# Altium PCB PCB_Completo.PcbDoc
Units mm, origin at the board's own origin, x right, y up, seen from the top; angles counter-clockwise.
Board outline 257.56 x 147.12 mm, 2 copper layers (Top Layer, Bottom Layer); 126 components, 96 nets, 482 pads, 51 vias.
Unrouted connection lines stored in the file: 42.
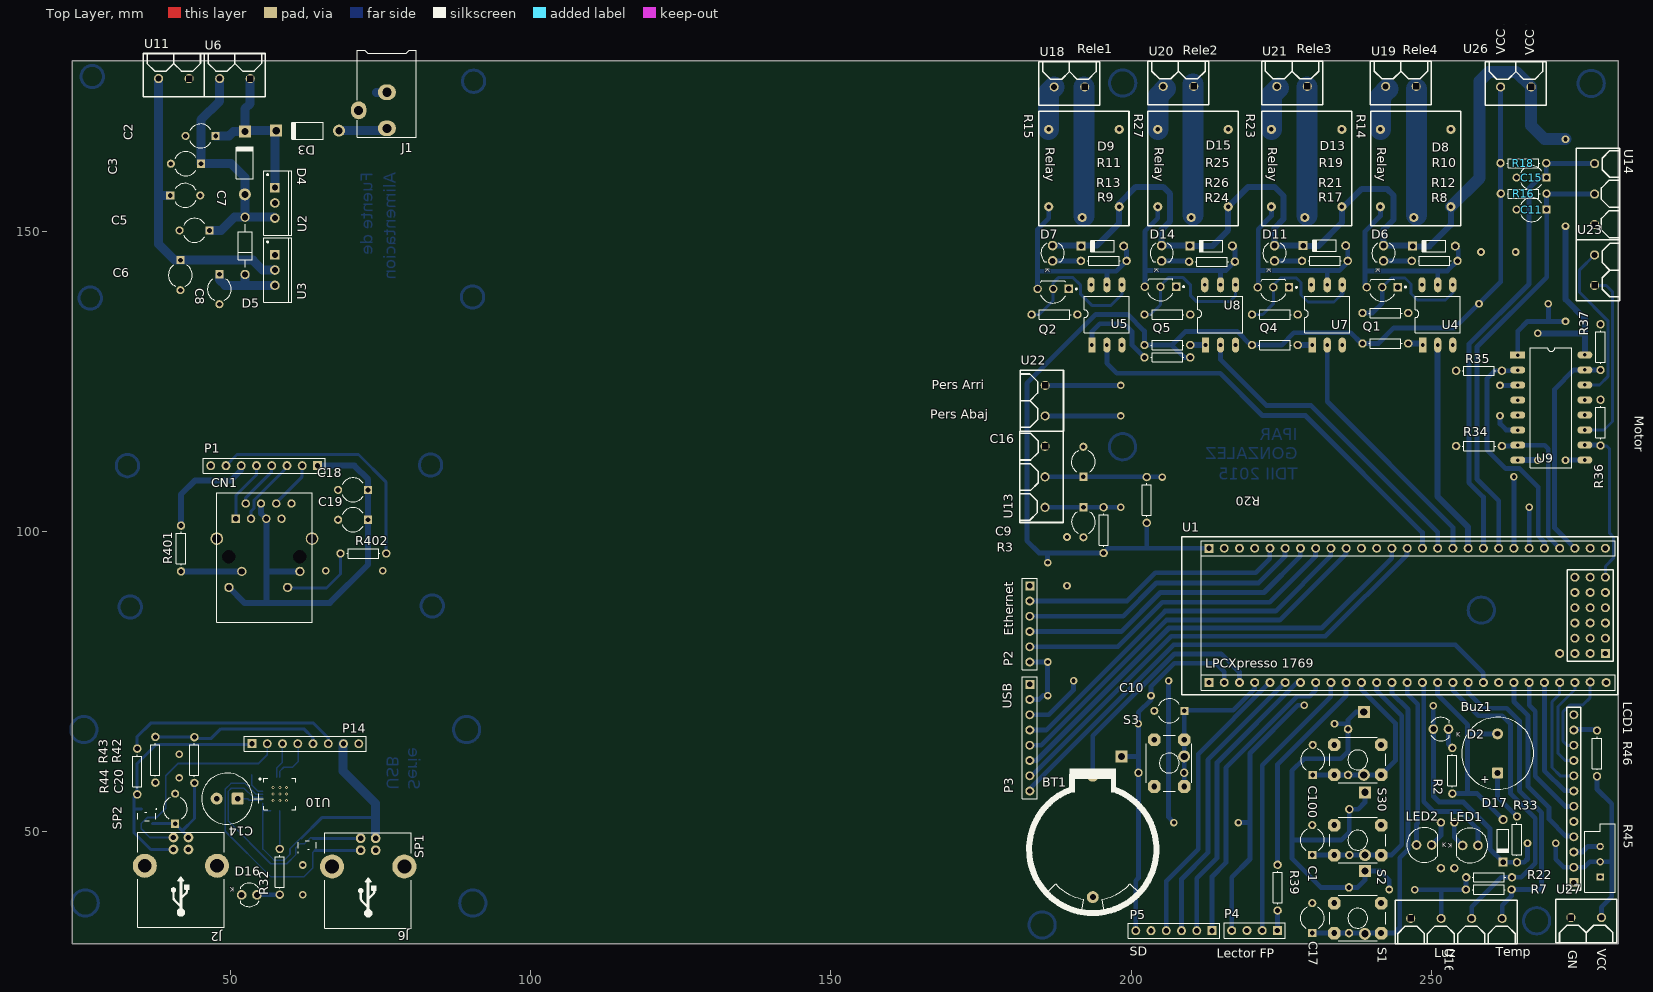
[diagram p0: Top Layer view]
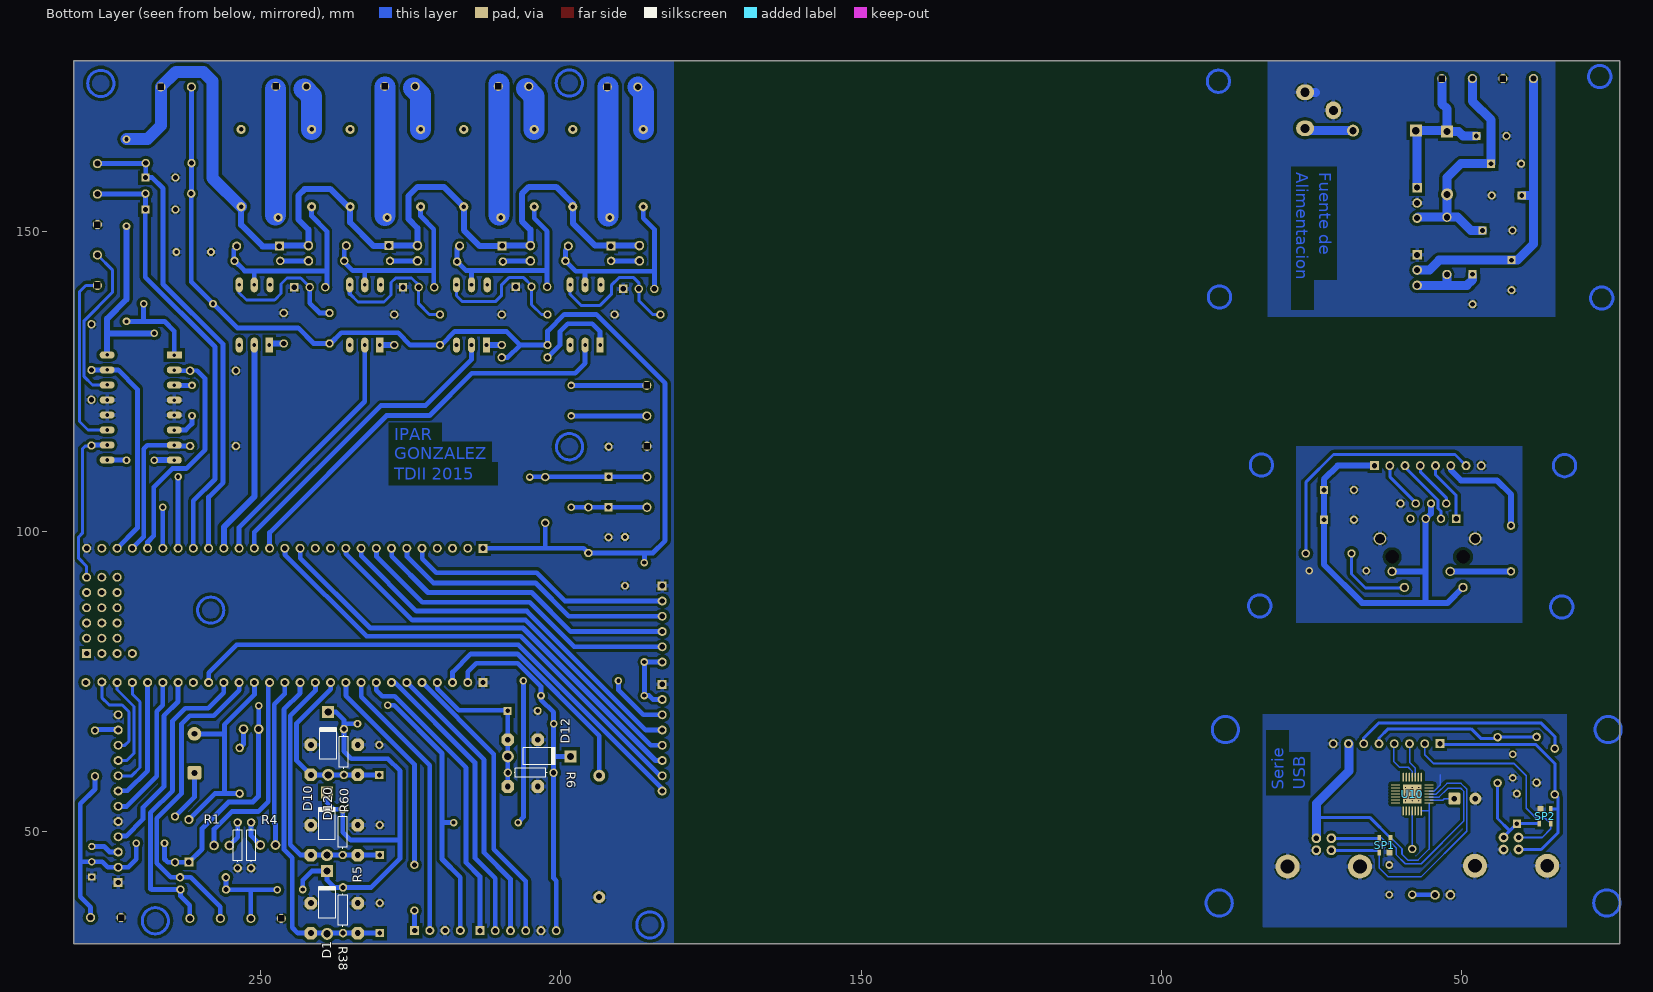
[diagram p1: Bottom Layer view, seen from below]

## Layer stack, top to bottom
Top Solder: solder mask 0.0102, Solder Resist, Dk 3.5
Top Layer: signal copper 0.0356
Dielectric 1: dielectric 0.32, FR-4, Dk 4.8
Bottom Layer: signal copper 0.0356
Bottom Solder: solder mask 0.0102, Solder Resist, Dk 3.5

## Board outline
23.622,31.318 281.178,31.318 281.178,178.435 23.622,178.435

## Design rules (kind name [scope] priority, off if disabled: settings)
Clearance [InNet('GND')] p1: gap=0.5
HoleSize [All] p1: absolutevalues=TRUE maxlimit=2.54 minlimit=0.1 maxpercent=80.000 minpercent=20.000
PlaneClearance [All] p1: clearance=0.254
PlaneConnect [All] p1: planeconnectstyle=Relief reliefexpansion=0.508 reliefentries=4 reliefconductorwidth=0.5 reliefairgap=0.5
PolygonConnect [All] p1: connectstyle=Relief reliefconductorwidth=0.7 reliefentries=4 polygonreliefangle="90 Angle" airgapwidth=0.254
RoutingVias [All] p1: holewidth=0.711 width=1.27 viastyle="Through Hole" minholewidth=0.711 minwidth=1.27 maxholewidth=0.711 maxwidth=1.27
SolderMaskExpansion [All] p1: expansion=0.102
UnpouredPolygon [All] p1: allowunpoured=FALSE
Width [All] p1: maxlimit=3.5 minlimit=0.254 preferedwidth=0.5 minimp=50.000000 maximp=50.000000 favimp=50.000000
26 further rules are at their usual default settings.

## Classes and differential pairs
component class U_USB: C14 C20 D16 J2 J6 P14 R32 R42 R43 R44 SP1 SP2 U10
component class U_Sensores: P4 R7 R22 R39 U16
component class U_Reles: D6 D7 D8 D9 D11 D13 D14 D15 P6 P7 P8 P9 P10 Q1 Q2 Q4 Q5 R8 R9 R10 R11 R12 R13 R14 R15 R17 R19 R21 R23 R24 R25 R26 R27 U4 U5 U7 U8 U18 U19 U20 U21
component class U_Motor: R34 R35 R36 R37 U9 U22 U23
component class "Fuente de Alimentación": C2 C3 C5 C6 C7 C8 D3 D4 D5 J1 U2 U3 U6 U11
component class U_FinDeCarrera: C9 C11 C15 C16 R3 R16 R18 R20 U13 U14
component class U_Ethernet: C18 C19 CN1 P1 R401 R402
component class U_Buzzer: Buz1 C1 C10 C17 C100 D1 D2 D10 D12 D17 D120 LED1 LED2 R1 R2 R4 R5 R6 R33 R38 R60 S1 S2 S3 S30
component class LPC1769: BT1 P2 P3 P5 U1 U26 U27
component class LCD: LCD1 R45 R46

## Components (designator, comment, footprint, x,y, rotation, side; value= is the part's Value field where it differs from the comment)
BT1 "120591-1" TECO-120591-1-2_V 193.624,47.015 r90 top
Buz1 "Alternate part: 3100-932" BUZZER_12.0X8.5MM 261.061,63.016 r90 top
C1 "Cap2" CAPR5-4X5 230.186,48.572 r90 top
C2 "Cap2" CAPR5-4X5 45.009,165.862 r180 top
C3 "Cap2" CAPR5-4X5 42.545,161.239 r180 top
C5 "Cap2" CAPR5-4X5 43.993,150.139 r180 top
C6 "Cap2" CAPR5-4X5 48.133,140.335 r270 top
C7 "Cap2" CAPR5-4X5 42.443,155.956 r0 top
C8 "Cap2" CAPR5-4X5 41.631,142.672 r270 top
C9 "Cap2" CAPR5-4X5 192.075,101.513 r270 top
C10 "Cap2" CAPR5-4X5 206.375,70.104 r180 top
C11 "Cap2" CAPR5-4X5 266.725,153.594 r180 top
C14 "1uF x 16V" CAPE3.5mm 49.428,55.474 r180 top
C15 "Cap2" CAPR5-4X5 266.715,158.928 r180 top
C16 "Cap2" CAPR5-4X5 192.049,111.593 r90 top
C17 "Cap2" CAPR5-4X5 230.186,35.566 r90 top
C18 "Cap2" CAPR5-4X5 70.409,106.909 r180 top
C19 "Cap2" CAPR5-4X5 70.409,101.93 r180 top
C20 "Cap2" CAPR5-4X5 40.767,53.797 r90 top
C100 "Cap2" CAPR5-4X5 230.263,61.932 r90 top
CN1 "Ethernet" RJ45 47.694,84.82 r0 top
D1 "1N4007" DO-41 238.949,38.185 r90 bottom
D2 "LED1" "Type 3mm" 251.612,67.056 r0 top
D3 "1N4007" DO-41 62.824,166.744 r180 top
D4 "1N4007" DO-41 52.375,161.366 r90 top
D5 "1N5819" ONSC-AXIAL_LEAD-2-59-10_P 52.41,147.567 r90 top
D6 "LED1" "Type 3mm" 242.062,146.329 r270 top
D7 "LED1" "Type 3mm" 186.944,146.329 r270 top
D8 "1N4148" DO-35 250.469,147.523 r180 top
D9 "1N4148" DO-35 195.224,147.523 r180 top
D10 "1N4007" DO-41 238.975,51.302 r90 bottom
D11 "LED1" "Type 3mm" 223.901,146.329 r270 top
D12 "1N4007" DO-41 203.62,62.509 r180 bottom
D13 "1N4148" DO-35 232.207,147.599 r180 top
D14 "LED1" "Type 3mm" 205.105,146.329 r270 top
D15 "1N4148" DO-35 213.335,147.549 r180 top
D16 "Red-LED" "Type 3mm" 53.111,39.446 r180 top
D17 "1N4148" DO-35 261.976,48.438 r270 top
D120 "1N4007" DO-41 238.772,64.662 r90 bottom
J1 "CONN_PWR_JACK_2.1x5.5mm" CONN_PWR_JACK_2.1x5.5mm 76.032,180.841 r0 top
J2 "USB-B" USB_TypeB_Tyco 41.732,34.011 r90 top
J6 "USB-B" USB_TypeB_Tyco 72.923,33.884 r90 top
LCD1 "GDM1602K" LCD 273.761,41.504 r90 top
LED1 "Verde" "Type 5mm" 256.515,47.676 r180 top
LED2 "Rojo" "Type 5mm" 248.818,47.752 r0 top
P1 "Header 8" HDR1X8 64.469,110.945 r180 top
P2 "Header 6" HDR1X6 183.134,90.932 r270 top
P3 "Header 8" HDR1X8 183.134,74.524 r270 top
P4 "Huella Digital" HDR1X4 224.384,33.503 r180 top
P5 "Header 6" HDR1X6 213.487,33.477 r180 top
P14 "Header 8" HDR1X8 53.569,64.618 r0 top
Q1 "2N5551RL1G" ONSC-TO-92-3-29-11_AM_BL 241.859,140.691 r180 top
Q2 "2N5551RL1G" ONSC-TO-92-3-29-11_AM_BL 187.029,140.382 r180 top
Q4 "2N5551RL1G" ONSC-TO-92-3-29-11_AM_BL 223.704,140.657 r180 top
Q5 "2N5551RL1G" ONSC-TO-92-3-29-11_AM_BL 204.904,140.757 r180 top
R1 "Res1" AXIAL-0.3 253.848,47.701 r90 bottom
R2 "Res1" AXIAL-0.3 253.517,60.121 r90 top
R3 "Res1" AXIAL-0.3 195.428,100.203 r270 top
R4 "Res1" AXIAL-0.3 251.612,47.701 r90 bottom
R5 "Res1" AXIAL-0.3 236.359,49.893 r90 bottom
R6 "Res1" AXIAL-0.3 205.04,59.792 r180 bottom
R7 "Res1" AXIAL-0.3 259.588,40.335 r180 top
R8 "Res1" AXIAL-0.3 242.367,131.293 r180 top
R9 "Res1" AXIAL-0.3 206.045,128.981 r0 top
R10 "Res1" AXIAL-0.3 250.571,145.059 r180 top
R11 "Res1" AXIAL-0.3 195.453,145.059 r180 top
R12 "Res1" AXIAL-0.3 242.367,136.373 r180 top
R13 "Res1" AXIAL-0.3 187.249,136.119 r180 top
R14 "Relay-12VDC" Rele 239.903,169.951 r270 top
R15 "Relay-12VDC" Rele 184.658,169.951 r270 top
R16 "Res1" AXIAL-0.3 265.405,156.261 r180 top
R17 "Res1" AXIAL-0.3 223.952,131.039 r180 top
R18 "Res1" AXIAL-0.3 265.354,161.341 r180 top
R19 "Res1" AXIAL-0.3 232.283,145.059 r180 top
R20 "Res1" AXIAL-0.3 202.616,105.232 r270 top
R21 "Res1" AXIAL-0.3 223.952,136.119 r180 top
R22 "Res1" AXIAL-0.3 259.639,42.367 r180 top
R23 "Relay-12VDC" Rele 221.742,169.951 r270 top
R24 "Res1" AXIAL-0.3 206.045,131.039 r180 top
R25 "Res1" AXIAL-0.3 213.487,144.932 r180 top
R26 "Res1" AXIAL-0.3 206.045,136.119 r180 top
R27 "Relay-12VDC" Rele 202.819,169.951 r270 top
R32 "Res1" AXIAL-0.3 58.191,43.282 r90 top
R33 "Res1" AXIAL-0.3 264.287,48.692 r270 top
R34 "Res1" AXIAL-0.3 257.962,114.21 r0 top
R35 "Res1" AXIAL-0.3 257.962,126.746 r180 top
R36 "Res1" AXIAL-0.3 278.206,118.11 r270 top
R37 "Res1" AXIAL-0.3 278.206,130.683 r90 top
R38 "Res1" AXIAL-0.3 236.308,36.881 r90 bottom
R39 "Res1" AXIAL-0.3 224.409,40.64 r270 top
R42 "Res1" AXIAL-0.3 43.967,61.9 r90 top
R43 "Res1" AXIAL-0.3 37.465,61.951 r90 top
R44 "Res1" AXIAL-0.3 34.442,59.995 r270 top
R45 "RPot" VR5 278.155,44.958 r90 top
R46 "Res1" AXIAL-0.3 277.622,63.017 r270 top
R60 "Res1" AXIAL-0.3 236.155,63.242 r90 bottom
R401 "Res1" AXIAL-0.3 41.744,97.145 r270 top
R402 "Res1" AXIAL-0.3 72.111,96.317 r180 top
S1 "SW_THT_PB_5.0mm" TACT-SWITCH-TC-37XB 237.756,35.571 r180 top
S2 "SW_THT_PB_5.0mm" TACT-SWITCH-TC-37XB 237.756,48.572 r180 top
S3 "SW_THT_PB_5.0mm" TACT-SWITCH-TC-37XB 206.35,61.392 r270 top
S30 "SW_THT_PB_5.0mm" TACT-SWITCH-TC-37XB 237.756,61.932 r180 top
SP1 "SP0503BAHT" SOT190P237X120-4N 62.763,47.727 r90 top
SP2 "SP0503BAHT" SOT190P237X120-4N 36.068,52.527 r270 top
U1 "LPCXPRESSO1769" Stick 208.407,99.085 r0 top
U2 "LM78M05CT" T03B 57.363,154.704 r270 top
U3 "LM1117T-3.3" T03B 57.363,143.528 r270 top
U4 "4N25" DIP6 248.59,131.039 r90 top
U5 "4N25" DIP6 193.472,131.039 r90 top
U6 "Bornera_2P" Bornera 55.804,179.603 r0 top
U7 "4N25" DIP6 230.175,131.039 r90 top
U8 "4N25" DIP6 212.395,131.039 r90 top
U9 "L293D" DIP16 264.414,129.362 r0 top
U10 "CP2102" CP2102 58.191,56.236 r90 top
U11 "Bornera_2P" Bornera 45.618,179.603 r0 top
U13 "Bornera_3T" BORNERA_3 181.483,101.473 r90 top
U14 "Bornera_3T" BORNERA_3 281.407,163.805 r270 top
U16 "Bornera_4T" BORNERA_4 244.043,31.318 r180 top
U18 "Bornera_2P" Bornera 194.818,178.232 r0 top
U19 "Bornera_2P" Bornera 250.038,178.308 r0 top
U20 "Bornera_2P" Bornera 212.979,178.308 r0 top
U21 "Bornera_2P" Bornera 231.902,178.308 r0 top
U22 "Bornera_2P" Bornera 181.508,126.848 r90 top
U23 "Bornera_2P" Bornera 281.407,138.43 r270 top
U26 "Bornera_2P" Bornera 269.189,178.232 r0 top
U27 "Bornera_2P" Bornera 270.739,31.471 r180 top

## Footprints (in the part's own frame and the unit in brackets; to place one, negate y for a bottom-side part, rotate by r counter-clockwise, add the part's x,y. Pads: shape width x height; smd on the part's side, far side on the other; paste and mask are expansions set on the pad)
AXIAL-0.3 [mm] "Axial Device, Thru-Hole; 2 Leads; 0.3 in Pin Spacing"
  round 1.4 hole 0.85: 1(-3.81,0) 2(3.81,0)
  silkscreen extent -2.77,-0.76 2.77,0.76
Bornera [mil] "Bornera Pitch 5_mm"
  round 60 hole 39.37 square: 1(-100,-165)
  round 60 hole 39.37: 2(-300,-165)
  silkscreen extent -400,-285 0,0
BORNERA_3 [mil] "Bornera de 3 Terminales Pitch 5 mm"
  round 60 hole 39.37 square: 1(500,-165)
  round 60 hole 39.37: 2(300,-165) 3(100,-165)
  silkscreen extent 0,-285 600,0
BORNERA_4 [mil] "Bornera de 4 Terminales Pitch 5 mm"
  round 60 hole 39.37 square: 1(-100,-165)
  round 60 hole 39.37: 2(-300,-165) 3(-500,-165) 4(-700,-165)
  silkscreen extent -800,-285 0,0
BUZZER_12.0X8.5MM [mil]
  round 20 on Mech15: 0(0,0)
  rrect25% 72x72 / inner rrect25% 72x72 / far side rrect25% 90x90 hole 38: 1(-127.95,0)
  round 72 / inner round 72 / far side round 90 hole 38: 2(127.95,0)
  silkscreen extent -236,-236 236,236, body extent -246,-246 246,246, height 354
CAPE3.5mm [mm]
  round 0.508 on Mech15: 0(0,0)
  rrect25% 2x2 hole 0.9: 1(-1.75,0)
  round 2 hole 0.9: 2(1.75,0)
  silkscreen extent -6.05,-4.25 4.25,4.25, body extent -4.25,-4.25 4.22,4.23, height 7.1
CAPR5-4X5 [mm] "Capacitor; 2 Leads"
  rect 1.35x1.35 hole 0.8: 1(-2.5,0)
  round 1.35 hole 0.8: 2(2.5,0)
  silkscreen extent -1.69,-2 1.82,2
CONN_PWR_JACK_2.1x5.5mm [mm] "Power Connector, 2.1mm ID, 5.5mm OD"
  oval 3x2.6 hole 1.511: 1(0,-13.7) 2(0,-7.7)
  oval 2.6x3 hole 1.511: 3(-4.7,-10.7)
  silkscreen extent -4.9,-15.22 4.92,-0.7, body extent -4.9,-14.1 4.5,0, height 11
CP2102 [mm]
  oval 0.2x1.5 smd far side: 1(1.5,2.806) 2(1,2.806) 3(0.5,2.806) 4(0,2.806) 5(-0.5,2.806) 6(-1,2.806) 7(-1.5,2.806) 15(-1.5,-2.806) 16(-1,-2.806) 17(-0.5,-2.806) 18(0,-2.806) 19(0.5,-2.806) 20(1,-2.806) 21(1.5,-2.806)
  oval 1.5x0.2 smd far side: 8(-2.806,1.5) 9(-2.806,1) 10(-2.806,0.5) 11(-2.806,0) 12(-2.806,-0.5) 13(-2.806,-1) 14(-2.806,-1.5) 22(2.806,-1.5) 23(2.806,-1) 24(2.806,-0.5) 25(2.806,0) 26(2.806,0.5) 27(2.806,1) 28(2.806,1.5)
  rect 3.13x3.13 smd far side: 29(0,0)
  silkscreen extent -2.65,-2.65 2.65,3.42, body extent -2.5,-2.5 2.5,2.5, height 1
DIP6 [mm]
  rect 2.5x1.2 hole 0.6: 1(0,0)
  oval 2.5x1.2 hole 0.6: 2(0,-2.5) 3(0,-5) 4(10.033,-5) 5(10.033,-2.5) 6(10.033,0.127)
  silkscreen extent 2.08,-6.25 8.13,1.25
DIP16 [mm]
  rect 2.5x1.2 hole 0.6: 1(0,0)
  oval 2.5x1.2 hole 0.6: 2(0,-2.5) 3(0,-5) 4(0,-7.5) 5(0,-10) 6(0,-12.5) 7(0,-15) 8(0,-17.5) 9(11.18,-17.474) 10(11.18,-14.974) 11(11.18,-12.474) 12(11.18,-9.974) 13(11.18,-7.474) 14(11.18,-4.974) 15(11.18,-2.474) 16(11.18,0.026)
  silkscreen extent 2.08,-18.75 9.02,1.25
DO-35 [mm] "Diode, Axial; Body 3.8 x 1.9 mm (LxDia. max), Lead Dia. 0.53 mm (max)"
  round 1.5 hole 0.9: 1(-3.55,0)
  rect 1.5x1.5 hole 0.9: 2(3.55,0)
  silkscreen extent -1.95,-0.95 2.05,0.95
DO-41 [mm] "Diode, Axial; Body 5.2 x 2.7 mm (LxDia. max), Lead Dia. 0.86 mm (max)"
  round 2 hole 1.2: 1(-5.23,0)
  rect 2x2 hole 1.2: 2(5.23,0)
  silkscreen extent -2.65,-1.4 2.75,1.4
HDR1X4 [mm] "Connector; Header; 4 Position"
  rect 1.5x1.5 hole 0.9: 1(0,0)
  round 1.5 hole 0.9: 2(2.54,0) 3(5.08,0) 4(7.62,0)
  silkscreen extent -1.27,-1.27 8.89,1.27
HDR1X6 [mm] "Connector; Header; 6 Position"
  rect 1.5x1.5 hole 0.9: 1(0,0)
  round 1.5 hole 0.9: 2(2.54,0) 3(5.08,0) 4(7.62,0) 5(10.16,0) 6(12.7,0)
  silkscreen extent -1.27,-1.27 13.97,1.27
HDR1X8 [mm] "Connector; Header; 8 Position"
  rect 1.5x1.5 hole 0.9: 1(0,0)
  round 1.5 hole 0.9: 2(2.54,0) 3(5.08,0) 4(7.62,0) 5(10.16,0) 6(12.7,0) 7(15.24,0) 8(17.78,0)
  silkscreen extent -1.27,-1.27 19.05,1.27
LCD [mm] "LCD Display de 16x2 Caracter"
  rect 1.5x1.5 hole 0.9: 1(0,0)
  round 1.5 hole 0.9: 2(2.54,0) 3(5.08,0) 4(7.62,0) 5(10.16,0) 6(12.7,0) 7(15.24,0) 8(17.78,0) 9(20.32,0) 10(22.86,0) 11(25.4,0) 12(27.94,0)
  silkscreen extent -1.27,-1.14 29.21,1.14
ONSC-AXIAL_LEAD-2-59-10_P [mm] "AXIAL, 2-Leads, Diameter 2.35mm"
  round 1.55 hole 1.05: 1(-4.77,0) 2(4.77,0)
  silkscreen extent -3.59,-1.17 3.59,1.17
ONSC-TO-92-3-29-11_AM_BL [mm] "TO, 3-Leads, Body Dia 4.7mm, Pitch 2.6mm"
  rect 1.4x1.4 hole 0.9: 1(-2.6,0)
  round 1.4 hole 0.9: 2(0,0) 3(2.6,0)
  silkscreen extent -3.98,-1.34 2.13,2.35, body extent -2.84,-1.34 2.84,2.36, height 5.33
Rele [mil] "Rele - 5pin"
  round 60 hole 30: 1(118.11,64.17) 2(695.67,283.46) 3(118.11,526.38) 4(625,526.38) 5(625,64.17)
  silkscreen extent 0,0 750,591
RJ45 [mm] "RJ45 - Ethernet"
  rect 1.4x1.4 hole 0.89: 1(3.175,17.272)
  round 1.4 hole 0.89: 2(4.826,19.812) 3(5.715,17.272) 4(7.366,19.812) 5(8.255,17.272) 6(9.906,19.812) 7(10.795,17.272) 8(12.446,19.812)
  round 1.55 hole 1.02: 9(2.032,5.842) 10(4.165,8.513) 11(11.811,5.842) 12(13.843,8.509)
  round 2.1 hole 1.6: MH1(0.002,13.972) MH2(15.873,13.972)
  round 2 hole 2.25 unplated: ""(2.032,10.922) ""(13.843,10.922)
  silkscreen extent -0.03,0.02 15.88,21.61, body extent -0.68,5.46 12.78,20.14
SOT190P237X120-4N [mm] "SOT143, 4-Leads, Body 2,92x2,37mm, Pitch 1,90mm, IPC Medium Density"
  rect 1x1 smd far side: 1(-1.2,0.75)
  rect 1x0.6 smd far side: 2(-1.2,-0.95) 3(1.2,-0.95) 4(1.2,0.95)
  silkscreen extent -1.25,-1.5 0.7,1.6, body extent -0.7,-1.52 0.7,1.52, height 1.2
Stick [mm] "Connector; Header Stick"
  rect 1.5x1.5 hole 0.9: 1(4.572,-24.257) 28(4.572,-1.905) 68(70.612,-19.431)
  round 1.5 hole 0.9: 2(7.112,-24.257) 3(9.652,-24.257) 4(12.192,-24.257) 5(14.732,-24.257) 6(17.272,-24.257) 7(19.812,-24.257) 8(22.352,-24.257) 9(24.892,-24.257) 10(27.432,-24.257) 11(29.972,-24.257) 12(32.512,-24.257) 13(35.052,-24.257) 14(37.592,-24.257) 15(40.132,-24.257) 16(42.672,-24.257) 17(45.212,-24.257) 18(47.752,-24.257) 19(50.292,-24.257) 20(52.832,-24.257) 21(55.372,-24.257) 22(57.912,-24.257) 23(60.452,-24.257) 24(62.992,-24.257) 25(65.532,-24.257) 26(68.072,-24.183) 27(70.739,-24.257) 29(7.112,-1.905) 30(9.652,-1.905) 31(12.192,-1.905) 32(14.732,-1.905) 33(17.272,-1.905) 34(19.812,-1.905) 35(22.352,-1.905) 36(24.892,-1.905) 37(27.432,-1.905) 38(29.972,-1.905) 39(32.512,-1.905) 40(35.052,-1.905) 41(37.592,-1.905) 42(40.132,-1.905) 43(42.672,-1.905) 44(45.212,-1.905) 45(47.752,-1.905) 46(50.292,-1.905) 47(52.832,-1.905) 48(55.372,-1.905) 49(57.912,-1.905) 50(60.452,-1.905) 51(62.992,-1.905) 52(65.532,-1.905) 53(68.072,-1.905) 54(70.612,-1.905) 55(62.992,-19.431) 56(65.532,-19.431) 57(65.532,-16.891) 58(65.532,-14.351) 59(65.532,-11.811) 60(65.532,-9.271) 61(65.532,-6.731) 62(68.072,-19.431) 63(68.072,-16.891) 64(68.072,-14.351) 65(68.072,-11.811) 66(68.072,-9.271) 67(68.072,-6.731) 69(70.612,-16.891) 70(70.612,-14.351) 71(70.612,-11.811) 72(70.612,-9.271) 73(70.612,-6.731)
  silkscreen extent 0,-26.29 72.64,0
T03B [mm] "TO, Thru-Hole, Vertical, Heatsink Mounted; 3 In-Line Leads; Pitch 2.54 mm"
  rect 1.6x1.6 hole 1: 1(-2.54,0)
  round 1.6 hole 1: 2(0,0) 3(2.54,0)
  silkscreen extent -5.35,-1.85 5.35,2.85, body extent -5.4,-1.9 5.4,2.9, height 19.8
TACT-SWITCH-TC-37XB [mm] "Wealth Metal sealed TH tact switch"
  round 0.508 on Mech15: 0(0,0)
  oct 2.1x2.1 hole 0.965: 1(-3.9,-2.5) 1(3.9,-2.5) 2(-3.9,2.5) 2(3.9,2.5)
  silkscreen extent -4.67,-3.79 4.67,3.79, body extent -4.46,-3.6 4.46,3.6, height 5
TECO-120591-1-2_V [mm] "Lithium Battery Holder"
  round 2 hole 1: 1(12.275,0) 2(-7.95,0)
  silkscreen extent -10.6,-10.6 13.47,10.6, body extent -10.62,-10.59 13.17,10.63, height 10
"Type 3mm" [mm] "THT, LED-3mm, 2pin- Body 4.15mm(max)"
  round 1.6 hole 1: 1(1.27,0) 2(-1.27,0)
  silkscreen extent -1.66,-1.95 1.4,1.95, body extent -1.93,-1.94 1.87,1.94, height 10.5
"Type 5mm" [mm] "THT, LED-5mm, 2pin- Body 5.8mm"
  round 1.6 hole 1: 1(1.27,0) 2(-1.27,0)
  silkscreen extent -2.9,-2.9 2.29,2.9, body extent -2.9,-2.9 2.5,2.9, height 11.7
USB_TypeB_Tyco [mm]
  round 1.626 hole 0.914: 1(14.99,-1.25) 2(14.99,1.25) 3(12.99,1.25) 4(12.99,-1.25)
  round 4 hole 2.3: MH(10.28,-6.02) MH(10.28,6.02)
  silkscreen extent 0,-7.2 15.9,7.2, body extent 0,-7.19 15.7,7.19, height 11.5
VR5 [mm] "Thru-Hole; 3 Leads"
  rect 1.2x1.2 hole 0.7: 1(-2.54,0)
  round 1.2 hole 0.7: 2(0,0) 3(2.54,0)
  silkscreen extent -5.08,-2.54 6.35,2.54

## Part data
BT1: library part CMP-0438-00001-1, "Lithium Battery Holder for CR2032 3V Cell"
Buz1: library part BZ_12x8.5x6.5_2kHz, "Speaker, Magnetic Transducer"
C1 C2 C3 C5 C6 C7 C8 C9 C10 C11 C15 C16 C17 C18 C19 C20 C100: "Capacitor"
C14: library part CAPE_220u_16V_THD, "Capacitor THT Alum Elec 220uF 20% 16V"
CN1: "RJ45 8pin Socket"
D1 D3 D4 D10 D12 D120: library part "Diode 1N4007", "1 Amp General Purpose Rectifier"
D2 D6 D7 D11 D14 D16: library part CMP-1488-00002-1, "THT LED round mono-color color lens, WL-TMRW, Super Red"
D5: library part CMP-1055-00042-1, "Rectifier, 2-Pin Axial_Lead, Pb-Free, Bulk Bag"
D8 D9 D13 D15 D17: library part "Diode 1N4148", "High Conductance Fast Diode"
J1: "Power Connector, THT, 2.1mm ID, 5.5mm OD"
J2 J6: library part USB_TypeB, "Connector THT Type B USB connector"
LCD1: library part LCD, "LCD GDM1602K Rev2.2"
LED1: library part CMP-1489-00005-1, "THT LED round mono-color waterclear, WL-TMRW, Green"
LED2: library part CMP-1488-00008-1, "THT LED round mono-color color lens, WL-TMRW, Red"
P1 P3 P14: "Header, 8-Pin"
P2 P5: "Header, 6-Pin"
P4: library part "Header 4", "Header, 4-Pin"
Q1 Q2 Q4 Q5: library part CMP-1048-01479-1, "Amplifier Transistor, NPN Silicon, 3-Pin TO-92, Pb-Free, Tape and Reel"
R1 R2 R3 R4 R5 R6 R7 R8 R9 R10 R11 R12 R13 R16 R17 R18 R19 R20 R21 R22 R24 R25 R26 R32 R33 R34 R35 R36 R37 R38 R39 R42 R43 R44 R46 R60 R401 R402: "Resistor"
R14 R15 R23 R27 U10: library part Component_1
R45: "Potentiometer"
S1 S2 S3 S30: "Switch, tact, 5.0mm stem"
SP1 SP2: library part Component_1, "Diode Array 30pF 30kV"
U1: library part LPC1769_Stick
U2: library part CMP-0062-02484-2, "3-Terminal Positive Voltage Regulators, 3-pin TO-220"
U3: library part CMP-0062-02490-2, "800mA Low-Dropout Linear Regulator, 3-pin TO-220"
U4 U5 U7 U8: library part Opto-4N25, "Optoacoplador"
U9: "Texas Quadruple Half-H Drivers"
U13 U14: "Bornera de 3 Terminales Pitch 5mm"
U16: "Bornera de 4 Terminales Pitch 5mm"

## Via types
v1: diameter 1.27, hole 0.711, Top Layer to Bottom Layer, 42 vias
v2: diameter 0.5, hole 0.2, Top Layer to Bottom Layer, 9 vias

## Nets (pads, with @x,y where several pads share a name; then routed paths per layer and width w, separated by ;. In a path a pad name is that pad's centre, name@x,y a point inside that pad or via, vN(x,y) a via of type N, cw(c..) or ccw(c..) an arc to the next point about the centre after c; other vN are vias at no path point)
BOTON_LOG: C100.1 D120.1 R60.1 S30.2 U1.11 | length 30.1
  Bottom Layer w0.8: C100.1 233.856,59.432 R60.1 D120.1 241.656,59.432 244.043,61.82 244.043,68.021 238.354,73.711 U1.11@238.354,74.828
BOTóN_ENROLL: C17.1 D1.1 R38.1 S1.2 U1.13 | length 57.5
  Bottom Layer w0.8: C17.1@230.191,33.071 233.856,33.071 R38.1 241.656,33.071 243.815,33.071 244.754,34.011 244.754,45.618 246.151,47.015 246.151,70.358 243.459,73.05 U1.13
BOTóN_RESET: C10.1 D12.1 R6.1 S3.2 U1.4 | length 27
  Bottom Layer w0.8: S3.2@208.85,57.492 R6.1 D12.1 208.85,65.292 208.85,70.206 216.992,70.206 220.599,73.812 U1.4
BOTóN_SALIDA: C1.1 D10.1 R5.1 S2.2 U1.12 | length 44.4
  Bottom Layer w0.8: C1.1 233.856,46.072 D10.1 241.656,46.072 243.379,46.072 245.085,47.777 245.085,69.291 240.894,73.482 U1.12@240.894,74.828
DAT1: 
DAT2: 
ETH_RXN: CN1.6 P1.2 P2.2 U1.32 | length 52.7
  Bottom Layer w0.5: CN1.6 57.6,104.776 61.929,109.105 P1.2
  Bottom Layer w0.8: P2.2 199.314,88.392 204.038,93.116 220.777,93.116 223.114,95.453 U1.32@223.114,97.18
ETH_RXP: CN1.3 P1.3 P2.3 U1.33 | length 59.3
  Bottom Layer w0.5: CN1.3 53.409,103.36 53.86,103.811 53.86,105.138 59.389,110.667 P1.3
  Bottom Layer w0.8: P2.3 198.679,85.852 204.241,91.415 221.234,91.415 225.654,95.834 U1.33@225.654,97.18
ETH_TXN: CN1.1 P1.5 P2.4 U1.34 | length 61.9
  Bottom Layer w0.5: CN1.1 50.869,105.97 54.309,109.41 P1.5
  Bottom Layer w0.8: P2.4 198.349,83.312 204.851,89.814 222.148,89.814 228.194,95.86 U1.34@228.194,97.18
ETH_TXP: CN1.2 P1.4 P2.5 U1.35 | length 63.3
  Bottom Layer w0.5: CN1.2 52.52,105.596 56.849,109.925 P1.4
  Bottom Layer w0.8: P2.5 197.815,80.772 205.232,88.189 223.088,88.189 230.734,95.834 U1.35@230.734,97.18
FDC1: C9.1 R3.1 U1.49 U13.3 | length 19.5
  Bottom Layer w0.8: U13.3 C9.1 R3.1 v1(198.298,104.013) ; U1.49 v1(266.319,104.013)
FDC2: C16.1 R20.1 U1.48 U13.2 | length 31.5
  Top Layer w0.8: v1@263.728,109.042 v1(263.779,109.093)
  Bottom Layer w0.8: U13.2 C16.1 205.13,109.093 v1(205.181,109.042) ; U1.48 v1(263.779,109.093)
FDC3: C11.1 R16.1 U1.47 U14.2 | length 72.9
  Bottom Layer w0.8: U1.47@261.239,97.587 261.239,105.105 257.632,108.712 257.632,130.734 269.24,142.342 C11.1@269.24,153.518 ; C11.1@269.215,153.605 R16.1 ; R16.1@269.215,156.185 U14.2
FDC4: C15.1 R18.1 U1.46 U14.3 | length 79.2
  Bottom Layer w0.8: U1.46 258.699,105.715 256.286,108.128 256.286,131.191 266.294,141.199 266.294,157.15 268.072,158.928 C15.1 ; C15.1@269.164,158.979 R18.1@269.164,161.265 ; R18.1 R18.1@269.164,161.265 ; U14.3 R18.1@269.164,161.265
GND: BT1.2 C1.2 C2.2 C3.2 C5.2 C6.2 C7.2 C8.2 C9.2 C10.2 C11.2 C14.2 C15.2 C16.2 C17.2 C18.2 C19.2 C20.2 C100.2 CN1.8 CN1.MH1 CN1.MH2 D16.1 J1.2 J1.3 J2.4 J2.MH J6.4 J6.MH LCD1.1 LCD1.5 LCD1.12 P1.8 P2.1 P3.1 P4.3 P5.5 P14.8 Q1.1 Q2.1 Q4.1 Q5.1 R1.1 R4.1 R12.1 R13.1 R21.1 R26.1 R34.1 R35.2 R36.1 R37.2 R43.1 R45.1 S1.1 S2.1 S3.1 S30.1 SP1.1 SP2.1 U1.1 U1.54 U2.2 U3.1 U9.4 U9.5 U9.12 U9.13 U10.3 U10.14 U11.1 U13.1 U14.1 U16.1 U27.1 | length 6.8
  Top Layer w0.254: J6.MH@66.642,44.425 J6.MH@66.903,44.164
  Bottom Layer w0.254: 53.559,59.442 53.559,57.693 54.516,56.736 U10.3
  Bottom Layer w1: R21.1@227.695,136.186 R21.1
  Bottom Layer w1.5: J1.3@70.856,169.665 J1.3 ; 74.332,173.141 J1.2
  other v1: 62.027,39.472 62.027,44.425 41.427,58.928 41.427,62.865 189.332,90.932 65.862,93.447 75.362,93.447 189.332,99.06 258.293,146.533 264.058,146.533
LCD_DB4: LCD1.7 U1.23 | length 20.9
  Bottom Layer w0.8: U1.23 268.859,60.147 272.212,56.794 LCD1.7@273.685,56.794
LCD_DB5: LCD1.8 U1.24 | length 18.9
  Bottom Layer w0.5: U1.24 271.399,72.898 270.104,71.603 270.104,60.655 271.475,59.284 LCD1.8
LCD_DB6: LCD1.9 U1.25 | length 16.1
  Bottom Layer w0.5: LCD1.9 272.313,61.824 271.12,63.017 271.12,70.841 273.939,73.66 U1.25
LCD_DB7: LCD1.10 U1.26 | length 15.1
  Bottom Layer w0.5: LCD1.10 272.644,64.364 271.958,65.049 271.958,69.926 273.101,71.069 275.26,71.069 276.479,72.288 U1.26
LCD_ENABLE: LCD1.6 U1.22 | length 24.5
  Bottom Layer w0.8: U1.22 266.319,71.044 267.335,70.028 267.335,59.207 272.364,54.178 LCD1.6@273.685,54.178
LCD_RST: LCD1.4 U1.21 | length 30.4
  Bottom Layer w0.8: U1.21 263.779,71.653 266.141,69.291 266.141,57.48 269.634,53.988 269.634,52.032 272.44,49.225 LCD1.4@273.685,49.225
LED_GREEN: P1.6 R401.1 | length 17.7
  Bottom Layer w0.5: R401.1 R401.1@41.779,100.955
  Bottom Layer w1: R401.1 41.744,106.158 44.094,108.509 50.063,108.509 51.769,110.214 P1.6
LED_ROJO: LED2.2 U1.14 | length 27.9
  Bottom Layer w0.8: U1.14 245.999,72.923 247.752,71.171 247.752,51.384 247.536,51.168 ; LED2.2 247.548,51.181
LED_VERDE: LED1.2 U1.15 | length 33.6
  Bottom Layer w0.8: U1.15@248.514,74.828 248.768,74.574 248.768,54.991 250.431,53.327 254.851,53.327 257.785,50.394 LED1.2
LED_YELLOW: P1.7 R402.1 | length 41.2
  Bottom Layer w0.5: P1.7 51.079,112.795 71.304,112.795 75.921,108.179 R402.1
MISO: P5.3 U1.6 | length 48.5
  Bottom Layer w0.8: P5.3 208.407,42.088 212.801,46.482 212.801,61.951 U1.6
MOSI: P5.4 U1.5 | length 48.5
  Bottom Layer w0.8: P5.4 205.867,41.732 211.201,47.066 211.201,62.89 U1.5
NetBT1_1: BT1.1 U1.3 | length 39.7
  Bottom Layer w0.8: BT1.1 193.624,65.964 207.239,79.578 215.036,79.578 218.059,76.556 U1.3
NetBuz1_1: Buz1.1 R33.1 | length 8.6
  Bottom Layer w0.8: Buz1.1 261.061,55.728 R33.1
NetC6_1: C6.1 D5.1 U3.3 | length 12.1
  Bottom Layer w1.5: C6.1@48.133,142.741 48.133,141.935 49.08,140.988 U3.3 ; 52.41,141.125 D5.1
NetC14_1: C14.1 U10.6 | length 4.1
  Bottom Layer w0.254: C14.1 52.857,55.474 53.111,55.22 U10.6@55.198,55.22
NetC20_1: C20.1 J2.1 R42.1 SP2.4 | length 15.8
  Bottom Layer w0.5: SP2.4 37.048,51.297 C20.1 41.93,50.134 ; J2.1 42.982,49.082 41.93,50.134 ; R42.1 43.967,52.172 41.93,50.134
NetCN1_10: CN1.10 R401.2 | length 10.1
  Bottom Layer w0.5: R401.2 R401.2@41.746,93.333
  Bottom Layer w1: R401.2@41.746,93.333 CN1.10
NetCN1_11: CN1.11 R402.2 | length 13.1
  Bottom Layer w0.5: CN1.11@59.59,90.576 65.989,90.576 68.301,92.888 R402.2
NetD2_1: D2.1 R2.2 | length 3.7
  Bottom Layer w0.8: D2.1 252.882,64.566 R2.2 R2.2@253.517,64.286
NetD3_1: D3.1 J1.1 | length 8.1
  Bottom Layer w1.5: D3.1 75.635,166.744 J1.1
NetD6_1: D6.1 R10.2 | length 4.7
  Bottom Layer w0.8: D6.1 R10.2
NetD7_1: D7.1 R11.2 | length 4.7
  Bottom Layer w0.8: D7.1 R11.2
NetD8_1: D8.1 Q1.3 R10.1 R14.5 U4.5 | length 35.2
  Bottom Layer w0.5: D8.1@253.994,147.472 D8.1@254.508,146.958 ; R10.1 R10.1@254.508,145.186
  Bottom Layer w0.8: Q1.3@238.989,140.961 238.989,143.408 ; R14.5 241.533,152.531 238.989,149.987 238.989,143.408 ; U4.5 251.09,143.318 ; R10.1 252.705,143.383 239.014,143.383 238.989,143.408 ; R10.1@254.508,145.186 D8.1@254.508,146.958
NetD9_1: D9.1 Q2.3 R11.1 R15.5 U5.5 | length 34.2
  Bottom Layer w0.8: Q2.3 184.429,150.291 ; 184.598,150.46 186.288,152.15 R15.5 ; 184.617,143.332 197.536,143.332 R11.1 199.263,146.831 D9.1@198.749,147.345 ; U5.5 195.972,143.231
NetD11_1: D11.1 R19.2 | length 4.6
  Bottom Layer w0.8: D11.1 R19.2
NetD13_1: D13.1 Q4.3 R19.1 R23.5 U7.5 | length 34.8
  Bottom Layer w0.5: D13.1@235.579,147.345 236.093,146.831
  Bottom Layer w0.8: Q4.3@221.174,140.727 221.174,143.434 ; R23.5 223.372,152.531 221.174,150.333 221.174,143.434 ; U7.5 232.675,143.419 ; 236.093,146.831 R19.1 236.093,144.856 234.671,143.434 221.174,143.434
NetD14_1: D14.1 R25.2 | length 4.4
  Bottom Layer w0.8: D14.1 R25.2@209.55,145.059
NetD15_1: D15.1 Q5.3 R25.1 R27.5 U8.5 | length 34.8
  Bottom Layer w0.8: Q5.3 202.304,150.005 204.449,152.15 R27.5 ; 202.437,143.434 215.798,143.434 R25.1 217.297,147.136 D15.1 ; U8.5 214.895,143.419
NetD16_2: D16.2 R32.1 | length 3.8
  Bottom Layer w0.8: D16.2@54.407,39.472 R32.1
NetJ6_2: J6.2 SP1.3 U10.5 | length 39
  Bottom Layer w0.254: U10.5 53.713,55.736 52.248,57.201 50.089,57.201 49.632,56.744 49.632,51.689 56.693,44.628 59.36,44.628 60.886,46.154 60.886,47.286 61.581,47.981 62.332,47.981 63.278,48.927 SP1.3
  Bottom Layer w0.5: SP1.3@63.766,48.874 J6.2
NetJ6_3: J6.3 SP1.2 U10.4 | length 43.4
  Bottom Layer w0.254: U10.4 54.178,56.236 52.4,58.014 50.063,58.014 49.124,57.074 49.124,50.038 56.667,42.494 62.255,42.494 63.713,43.952 SP1.2 64.06,46.874
  Bottom Layer w0.5: 64.06,46.874 J6.3
NetLCD1_3: LCD1.3 R45.3 | length 4.8
  Bottom Layer w0.8: LCD1.3 275.184,46.584 276.098,47.498 R45.3
NetLCD1_11: LCD1.11 R46.1 | length 4.1
  Bottom Layer w0.8: LCD1.11@273.66,67.005 R46.1@277.724,67.005
NetLED1_1: LED1.1 R1.2 | length 4.4
  Bottom Layer w0.8: R1.2 253.848,49.073 LED1.1
NetLED2_1: LED2.1 R4.2 | length 4.4
  Bottom Layer w0.8: LED2.1 251.612,49.276 R4.2
NetP4_1: P4.1 R39.2 | length 3.3
  Bottom Layer w0.8: P4.1@224.409,33.528 R39.2
NetQ1_2: Q1.2 R12.2 U4.4 | length 23.3
  Bottom Layer w0.5: Q1.2 243.359,142.191 245.627,142.191 246.619,141.199 246.619,139.609 247.696,138.532 252.4,138.532 253.59,139.722 U4.4
  Bottom Layer w0.8: R12.2 240.208,136.373 241.859,138.024 Q1.2
NetQ2_2: Q2.2 R13.2 U5.4 | length 24.5
  Bottom Layer w0.5: R13.2 184.709,136.119 187.029,138.439 Q2.2 187.029,141.41 187.884,142.265 190.348,142.265 191.541,141.072 191.541,139.573 193.472,137.643 196.647,137.643 198.472,139.468 U5.4
NetQ4_2: Q4.2 R21.2 U7.4 | length 24.5
  Bottom Layer w0.5: R21.2 221.92,136.119 223.698,137.897 Q4.2@223.698,140.818 ; Q4.2@223.704,141.04 224.879,142.215 227.533,142.215 228.295,141.453 228.295,139.37 229.464,138.201 233.807,138.201 235.175,139.569
  Bottom Layer w0.8: Q4.2 Q4.2@223.704,141.04 ; 235.175,139.569 U7.4
NetQ5_2: Q5.2 R26.2 U8.4 | length 24.5
  Bottom Layer w0.5: R26.2 203.251,136.119 204.902,137.77 204.902,140.945 206.214,142.257 208.679,142.257 209.931,141.004 209.931,139.243 210.922,138.252 216.383,138.252 217.395,139.264 U8.4
NetR8_1: R8.1 U4.1 | length 2.2
  Bottom Layer w1: R8.1 U4.1@248.336,131.293
NetR9_1: R9.1 U5.1 | length 15.2
  Bottom Layer w0.8: U5.1 193.472,133.274 194.793,134.595 198.857,134.595 200.152,133.299 200.152,131.064 R9.1
NetR14_1: R14.1 U19.2 | length 7.3
  Bottom Layer w3.5: R14.1 241.533,172.47 U19.2@242.761,173.698
NetR14_2: R14.2 U19.1 | length 21
  Bottom Layer w3.5: R14.2@247.574,152.73 U19.1@247.574,173.685
NetR15_1: R15.1 U18.2 | length 7.5
  Bottom Layer w3.5: R15.1 186.288,173.131 U18.2
NetR15_2: R15.2 U18.1 | length 21.9
  Bottom Layer w1: R15.2 R15.2@192.126,152.549
  Bottom Layer w3.5: R15.2@192.126,152.549 U18.1@192.126,174.041
NetR17_1: R17.1 U7.1 | length 2.4
  Bottom Layer w1: R17.1 U7.1
NetR23_1: R23.1 U21.2 | length 7.4
  Bottom Layer w3.5: R23.1 223.372,172.661 U21.2@224.555,173.844
NetR23_2: R23.2 U21.1 | length 21.4
  Bottom Layer w3.5: R23.2@229.337,152.6 U21.1@229.337,174.015
NetR24_1: R24.1 U8.1 | length 2.5
  Bottom Layer w1: R24.1 U8.1
NetR27_1: R27.1 U20.2 | length 7.3
  Bottom Layer w3.5: R27.1 204.449,172.47 U20.2@205.727,173.749
NetR27_2: R27.2 U20.1 | length 21.8
  Bottom Layer w3.5: R27.2@210.312,152.662 U20.1@210.312,174.498
NetR32_2: R32.2 U10.11 | length 6.3
  Bottom Layer w0.254: R32.2 U10.11
NetU9_3: U9.3 U22.1 | length 15.5
  Bottom Layer w0.8: U22.1 v1(198.298,124.308) ; v1(261.468,124.308) U9.3@264.359,124.308
NetU9_6: U9.6 U22.2 | length 17.3
  Bottom Layer w0.8: U22.2 v1(198.298,119.228) ; v1(261.468,119.253) 261.468,117.907 262.484,116.891 U9.6@264.385,116.891
NetU9_11: U9.11 U23.1 | length 30.2
  Bottom Layer w0.5: U9.11 278.788,116.889 280.187,118.288 280.187,139.929 279.146,140.97 U23.1
NetU9_14: U9.14 U23.2 | length 27.6
  Bottom Layer w0.5: U9.14 278.033,124.389 279.41,125.766 279.41,135.092 274.726,139.776 274.726,143.561 U23.2
OBUZZER: Buz1.2 D17.1 R2.1 U1.16 | length 35.8
  Bottom Layer w0.8: U1.16@251.054,74.828 251.054,72.796 256.057,67.793 256.057,66.266 ; R2.1 256.057,56.311 ; Buz1.2 256.057,66.266 ; D17.1 257.653,56.311 256.057,56.311 ; 256.057,56.311 256.057,66.266
PERSI_DER: R34.2 U1.51 U9.7 | length 25.2
  Bottom Layer w0.8: R34.2 U9.7@264.262,114.21 ; U9.7@264.389,114.337 268.81,114.337 268.902,114.333 269.507,113.728 269.507,99.073 U1.51
PERSI_IZQ: R35.1 U1.50 U9.2 | length 39.2
  Bottom Layer w0.8: R35.1 U9.2@264.298,126.746 ; R35.1@261.772,126.848 261.764,126.847 260.579,126.746 259.283,125.451 259.283,113.589 262.416,110.456 264.753,110.456 267.843,107.366 267.843,99.238 268.859,98.222 U1.50
PUERTA_DER: R36.2 U1.73 U9.10 | length 26.6
  Bottom Layer w0.5: U9.10 U9.10@275.734,114.249 ; R36.2@278.257,114.249 279.197,114.249 279.73,113.716 279.73,99.67 280.34,99.06 280.34,95.504 279.019,94.183 U1.73
  Bottom Layer w0.8: U9.10 R36.2@278.118,114.389
PUERTA_IZQ: R37.1 U1.52 U9.15 | length 36.9
  Bottom Layer w0.8: U1.52 270.561,100.559 270.561,123.673 273.777,126.889 U9.15 R37.1@278.191,126.889
RELE1: U1.42 U5.2 | length 69.9
  Bottom Layer w0.8: U5.2 195.972,128.005 197.637,126.34 214.833,126.34 221.894,119.278 229.057,119.278 248.539,99.797 U1.42
RELE2: U1.43 U8.2 | length 53.2
  Bottom Layer w0.8: U8.2 214.895,128.64 222.58,120.955 229.997,120.955 251.079,99.873 U1.43
RELE3: U1.44 U7.2 | length 42.5
  Bottom Layer w0.8: U7.2 232.675,121.63 253.619,100.686 U1.44
RELE4: U1.45 U4.2 | length 36
  Bottom Layer w1: U4.2 251.09,105.78 256.159,100.711 U1.45
RX0: P3.6 P14.4 U1.40 U10.25 | length 83.6
  Bottom Layer w0.254: U10.25@58.201,59.042 58.21,59.042 58.21,60.065 58.852,60.706 60.325,60.706 61.239,61.62 P14.4@61.239,64.618
  Bottom Layer w0.8: P3.6 184.252,61.824 206.324,83.896 231.775,83.896 243.434,95.555 U1.40@243.434,97.18
RXD2: P3.7 P14.3 U1.41 U10.26 | length 85.1
  Bottom Layer w0.254: U10.26 57.691,60.562 58.572,61.443 P14.3@58.572,64.618
  Bottom Layer w0.8: P3.7 183.49,59.284 206.731,82.525 232.385,82.525 245.974,96.114 U1.41@245.974,97.18
RXD3: R39.1 U1.10 | length 35.1
  Bottom Layer w0.8: R39.1 224.409,61.214 235.814,72.619 U1.10@235.814,74.828
SCK: P5.2 U1.7 | length 48.8
  Bottom Layer w0.8: P5.2 210.947,42.215 214.325,45.593 214.325,61.493 227.66,74.828 U1.7
SENLUZ: R22.1 U1.17 U16.3 | length 53.7
  Bottom Layer w0.8: U1.17@253.594,74.828 253.594,73.533 257.861,69.266 261.849,69.266 263.22,67.894 263.22,56.286 267.329,52.178 267.329,44.723 264.973,42.367 R22.1 261.671,42.367 256.743,37.44 U16.3
SENSOR_TEMP: R7.1 U1.18 U16.4 | length 52
  Bottom Layer w0.8: U1.18 256.159,73.127 258.75,70.536 262.585,70.536 264.693,68.428 264.693,56.82 268.383,53.131 268.383,40.392 ; U16.4 261.823,37.694 263.398,39.268 R7.1 268.173,40.335
SSEL: P5.1 U1.8 | length 49.7
  Bottom Layer w0.8: P5.1 213.487,42.494 215.798,44.806 215.798,60.604 227.711,72.517 229.743,72.517 230.759,73.533 U1.8
TXD3: P4.2 U1.9 | length 46.1
  Bottom Layer w0.8: P4.2 221.844,61.011 233.274,72.441 U1.9@233.274,74.828
USB_D+: J2.3 P3.5 P14.1 R44.2 SP2.2 U1.37 | length 107.9
  Bottom Layer w0.5: 34.042,53.727 SP2.2 ; J2.3 36.718,47.001 33.884,49.835 33.884,55.626 R44.2 34.442,61.341 37.607,64.506 53.457,64.506 P14.1
  Bottom Layer w0.8: P3.5 185.014,64.364 205.867,85.217 224.765,85.217 235.814,96.266 U1.37@235.814,97.18
USB_D-: J2.2 P3.4 P14.2 SP2.3 U1.36 | length 101
  Bottom Layer w0.3: J2.2 36.547,49.001 35.118,50.429 SP2.3 36.115,52.324 37.643,52.324 39.192,53.873 39.192,59.258 41.275,61.341 54.686,61.341 56.109,62.763 P14.2
  Bottom Layer w0.8: P3.4 185.852,66.904 205.664,86.716 224.079,86.716 233.274,95.91 U1.36@233.274,97.18
VBUS: P3.8 P14.5 R42.2 R43.2 U1.19 | length 118.1
  Bottom Layer w0.5: R43.2@37.516,65.71 R42.2 44.129,65.872 44.469,65.532 46.787,65.532 48.362,67.107 62.205,67.107 63.729,65.583 P14.5
  Bottom Layer w0.8: P3.8 183.134,57.15 207.086,81.102 254.025,81.102 258.674,76.454 U1.19@258.674,74.828
VCC-3.3V: C7.1 C8.1 C18.1 C19.1 CN1.4 CN1.5 CN1.9 CN1.12 D1.2 D10.2 D12.2 D120.2 P1.1 P2.6 P3.2 P5.6 P14.6 R3.2 R5.2 R6.2 R7.2 R8.2 R9.2 R16.2 R17.2 R18.2 R20.2 R22.2 R24.2 R38.2 R44.1 R60.2 U1.2 U1.28 U3.2 U9.1 U9.9 U11.2 U16.2 U26.2 | length 538.2
  Top Layer w0.8: v1(243.002,40.335) v1@243.053,40.284
  Bottom Layer w0.5: R44.1 34.442,65.811 36.678,68.047 63.805,68.047 66.269,65.583 P14.6 ; R17.2@219.972,131.039 R17.2 ; R8.2@238.387,131.293 R8.2
  Bottom Layer w0.8: P3.2 184.658,71.984 185.318,72.644 v1(186.106,72.644) v1(186.106,78.232) P2.6 ; v1(186.106,94.793) 186.106,96.393 ; D12.2 201.204,62.509 ; P5.6 200.787,41.808 201.23,42.251 R6.2 201.23,69.861 203.327,71.958 v1(203.327,72.644) 203.327,74.176 207.18,78.029 214.097,78.029 215.519,76.606 U1.2 ; 202.616,97.612 R20.2@202.616,101.498 ; R9.2 208.864,128.981 206.807,131.039 ; U1.28 196.215,97.18 R3.2 186.106,96.393 ; R17.2@219.972,131.039 217.704,133.307 209.075,133.307 206.807,131.039 ; R17.2 225.095,131.039 227.127,133.071 236.609,133.071 R8.2@238.387,131.293 ; 226.898,48.565 235.026,48.565 236.359,49.897 R5.2 237.832,53.703 238.975,54.846 D10.2 ; v1(233.883,67.945) 236.155,67.945 ; R8.2 241.198,131.293 243.789,133.883 253.924,133.883 261.595,141.554 R16.2 ; D120.2 237.456,69.892 236.155,68.592 236.155,67.945 ; v1(243.002,40.335) 243.002,41.916 241.503,43.415 D1.2 238.949,41.895 237.745,40.691 R38.2 231.623,40.691 226.797,45.517 226.797,60.096 228.829,62.128 234.925,62.128 236.155,63.359 R60.2 236.155,67.945 ; v1(247.244,40.284) 255.727,40.284 R7.2 R22.2@255.778,42.316 ; U16.2 251.663,40.132 ; R16.2@261.544,156.312 R18.2 U26.2@261.544,174.041 ; U9.1 264.414,133.35 266.04,134.976 269.519,134.976 ; v1(269.519,137.922) 269.519,134.976 ; v1(272.364,111.862) U9.9@275.568,111.862 ; v1(272.364,134.976) 269.519,134.976 ; 186.106,96.393 184.683,96.393 182.651,98.425 182.651,124.663 194.132,136.144 199.441,136.144 202.235,133.35 R24.2 206.807,131.039
  Bottom Layer w1: CN1.9 52.3,88.087 66.523,88.087 72.909,94.473 C19.1 C18.1 72.909,108.65 70.614,110.945 P1.1 ; CN1.4 55.06,102.981 CN1.5 55.949,88.131 ; 55.983,93.329 CN1.12
  Bottom Layer w1.5: U11.2 37.998,155.956 ; C7.1 37.998,155.956 ; U3.2 55.354,143.528 53.71,145.172 C8.1 40.655,145.172 37.998,147.828 37.998,155.956
  other v1: 201.193,67.945 257.962,137.922
VCC_5V: C3.1 C5.1 D2.2 D4.1 D5.2 D17.2 J6.1 LCD1.2 P3.3 P4.4 P14.7 R33.2 R45.2 R46.2 SP1.4 U2.3 U6.2 U10.7 U10.8 U27.2 | length 249.9
  Bottom Layer w0.254: U10.7 55.385,53.416 ; U10.8 55.399,53.43 55.385,53.416 ; SP1.4@61.677,48.927 59.893,47.142 59.893,46.203 58.928,45.237 57.226,45.237 55.385,47.078 55.385,53.416
  Bottom Layer w0.5: SP1.4 65.185,52.299 74.173,52.299
  Bottom Layer w0.8: P3.3 186.284,69.444 190.424,73.584 v1(190.424,75.108) ; v1(206.248,75.133) 206.248,52.375 v1(207.137,51.486) ; P4.4 216.764,42.367 219.812,45.415 219.812,63.043 227.787,71.018 v1(228.854,71.018) ; v1(217.881,51.486) 219.761,51.486 ; v1(250.342,70.968) D2.2 250.342,66.904 250.393,66.853 250.393,55.829 251.308,54.915 255.372,54.915 259.791,50.495 259.791,47.072 D17.2 265.512,44.888 266.04,45.415 v1(266.04,48.057) ; v1(270.739,48.057) 270.739,45.364 272.059,44.044 LCD1.2 275.488,44.044 276.403,44.958 R45.2 280.086,44.958 ; R46.2 277.622,57.074 280.086,54.61 280.086,44.958 ; U27.2 278.359,37.389 280.086,39.116 280.086,44.958
  Bottom Layer w1.5: C3.1 45.044,168.539 48.184,171.679 U6.2 ; C3.1 50.089,161.239 52.41,158.918 D5.2 ; C5.1 48.412,150.139 50.61,152.337 D5.2 ; U2.3@57.19,152.337 D5.2 ; P14.7@68.732,64.618 68.732,60.071 74.173,54.63 74.173,52.299 J6.1
VCC_12V: C2.1 D3.2 D4.2 D6.2 D7.2 D8.2 D9.2 D11.2 D13.2 D14.2 D15.2 R14.4 R15.4 R23.4 R27.4 U2.1 U6.1 U9.8 U9.16 U26.1 | length 230.2
  Bottom Layer w0.254: C2.1@47.457,165.728 C2.1@47.509,165.728
  Bottom Layer w1: D7.2 194.31,147.599 198.028,151.317 R15.4 198.028,154.619 200.787,157.378 205.359,157.378 206.502,156.235 206.502,151.663 205.105,150.266 D14.2 D15.2@209.302,147.599 ; D15.2@210.039,147.574 213.589,147.574 216.189,150.174 R27.4 219.491,157.378 223.901,157.378 225.425,155.854 225.425,152.044 223.901,150.52 D11.2 D13.2@228.225,147.599 ; D13.2@228.479,147.345 228.708,147.574 231.242,147.574 235.112,151.444 R23.4 235.458,154.076 238.443,157.061 242.634,157.061 ; 242.697,156.997 243.713,155.981 243.713,151.917 242.062,150.266 D6.2 D8.2@246.767,147.599 ; D8.2@246.894,147.472 249.682,147.472 253.273,151.063 R14.4 ; U9.8 v1(267.741,111.862) ; v1(267.767,132.994) 275.539,132.994 ; v1(272.364,150.851) 272.364,138.659 275.594,135.428 U9.16
  Bottom Layer w1.5: C2.1 49.733,165.862 50.467,166.596 D4.2 D4.2@52.375,166.744 ; U6.1 53.264,171.247 52.375,170.358 D4.2@52.375,166.744 ; U2.1 57.363,166.513 D3.2 D4.2@52.375,166.744
  Bottom Layer w2: R14.4 258.039,158.842 258.039,175.006 259.563,176.53 264.16,176.53 U26.1 266.649,167.589 268.91,165.329 v1(272.364,165.329)
pads on no net: Buz1.0 C14.0 CN1. CN1.7 R14.3 R15.3 R23.3 R27.3 S1.0 S2.0 S3.0 S30.0 U1.20 U1.27 U1.29 U1.30 U1.31 U1.38 U1.39 U1.53 U1.55 U1.56 U1.57 U1.58 U1.59 U1.60 U1.61 U1.62 U1.63 U1.64 U1.65 U1.66 U1.67 U1.68 U1.69 U1.70 U1.71 U1.72 U4.3 U4.6 U5.3 U5.6 U7.3 U7.6 U8.3 U8.6 U10.1 U10.2 U10.9 U10.10 U10.12 U10.13 U10.15 U10.16 U10.17 U10.18 U10.19 U10.20 U10.21 U10.22 U10.23 U10.24 U10.27 U10.28 U10.29
copper on no net: | length 230.9
  Bottom Layer w0.254: 56.855,140.988 57.363,140.988 ; 74.121,48.874 74.173,48.874
  Bottom Layer w0.5: 200.762,114.099 cw(c198.582,114.099) 200.762,114.148 ; 27.733,66.98 ccw(c25.552,66.98) 27.733,66.98 ; 27.961,38.1 ccw(c25.781,38.1) 27.961,38.1 ; 28.476,138.862 ccw(c26.619,138.862) 28.476,138.862 ; 28.806,175.768 ccw(c26.949,175.768) 28.806,175.768 ; 34.674,110.947 ccw(c32.817,110.947) 34.674,110.947 ; 35.131,87.401 ccw(c33.274,87.401) 35.131,87.401 ; 85.169,111.049 ccw(c83.312,111.049) 85.169,111.049 ; 85.448,87.579 ccw(c83.591,87.579) 85.448,87.579 ; 91.487,66.98 ccw(c89.306,66.98) 91.487,66.98 ; 92.154,139.04 ccw(c90.297,139.04) 92.154,139.04 ; 92.332,174.981 ccw(c90.475,174.981) 92.332,174.981 ; 92.528,38.075 ccw(c90.348,38.075) 92.528,38.075 ; 187.372,34.442 ccw(c185.191,34.442) 187.372,34.442 ; 200.783,174.676 ccw(c198.603,174.676) 200.783,174.676 ; 260.524,86.868 ccw(c258.343,86.868) 260.524,86.868 ; 269.744,35.128 ccw(c267.564,35.128) 269.744,35.128 ; 278.837,174.625 ccw(c276.657,174.625) 278.837,174.625
  other v2: 57.091,55.136 58.191,55.136 59.291,55.136 57.091,56.236 58.191,56.236 59.291,56.236 57.091,57.336 58.191,57.336 59.291,57.336

## Polygon pours and split planes (outlines as drawn)
GND on Bottom Layer "GND_USB" (solid, pour order 7): 33.503,69.571 32.487,69.571 32.487,68.555 32.487,38.329 32.487,34.036 32.512,34.061 83.058,34.061 83.058,69.571
GND on Bottom Layer "GND_Ethernet" (solid, pour order 6): 77.546,84.811 39.853,84.811 39.853,114.148 77.546,114.148
GND on Bottom Layer "GND_Fuente" (solid, pour order 8): 34.392,178.41 34.392,135.712 82.296,135.712 82.296,178.41
GND on Bottom Layer "GND_BB" (solid, pour order 5): 181.229,178.435 181.229,31.318 281.178,31.318 281.178,178.435

## Other copper
Bottom Layer:
  text "Fuente de" at 73.66,159.817 h2 r90
  text "Alimentacion" at 77.47,159.817 h2 r90
  text "IPAR" at 227.762,115.189 h2
  text "GONZALEZ" at 227.762,112.014 h2
  text "TDII 2015" at 227.762,108.585 h2
  text "USB" at 76.048,56.972 h2 r270
  text "Serie" at 79.629,56.972 h2 r270

## Silkscreen, mask and mechanical layers (free items; w line width, h text height)
Top Overlay:
  text "Rele1" at 191.059,179.603 h1.52
  text "Rele3" at 227.609,179.603 h1.52
  text "Rele4" at 245.262,179.502 h1.52
  text "Rele2" at 208.61,179.426 h1.52
  text "VCC 3.3V" at 262.357,179.4 h1.52 r90
  text "VCC 12V" at 267.157,179.299 h1.52 r90
  text "Puerta Cerr" at 288.95,147.879 h1.52
  text "Puerta Abrt" at 289.484,142.723 h1.52
  text "Pers Arri" at 166.776,123.647 h1.52
  text "Motor" at 283.896,119.228 h1.52 r270
  text "Pers Abaj" at 166.522,118.72 h1.52
  text "Ethernet" at 180.365,82.575 h1.52 r90
  text "USB" at 180.111,70.46 h1.52 r90
  text "VCC 5V" at 277.647,30.429 h1.52 r270
  text "GND" at 272.821,30.226 h1.52 r270
  text "SD" at 199.822,29.286 h1.52
  text "Temp" at 260.731,29.185 h1.52
  text "Luz" at 250.52,29.083 h1.52
  text "Lector FP" at 214.3,28.956 h1.52
Mechanical 15:
  lines w0.254: 181.229,178.435 181.229,31.267 281.178,31.267 281.178,178.435 ; 181.254,178.46 281.203,178.46 ; 21.539,33.985 95.199,33.985 95.199,70.129 21.539,70.129 21.539,33.985 ; 23.622,135.702 93.777,135.702 93.777,178.427 23.622,178.427 23.622,135.702 ; 29.235,84.785 29.235,114.148 87.173,114.148 87.173,84.785 29.235,84.785
  lines w0.5: 41.427,58.928 41.427,62.865 ; 62.027,39.472 62.027,44.425 ; 65.862,93.447 75.362,93.447 ; 189.332,90.932 189.332,99.06 ; 258.293,146.533 264.058,146.533 ; 272.364,150.851 272.364,165.329
  lines w0.8: 186.106,72.644 203.327,72.644 ; 186.106,78.232 186.106,94.793 ; 190.424,75.108 206.223,75.108 ; 198.298,104.013 266.319,104.013 ; 198.298,119.228 261.468,119.228 ; 198.298,124.308 261.468,124.308 ; 201.193,67.945 233.883,67.945 ; 205.181,109.042 263.728,109.042 ; 207.137,51.486 217.881,51.486 ; 228.854,70.968 236.922,70.968 237.501,71.546 240.042,71.546 240.621,70.968 250.342,70.968 ; 243.053,40.284 247.244,40.284 ; 257.962,137.922 269.519,137.922 ; 266.04,48.057 270.739,48.057 ; 272.364,111.862 272.364,134.976
  lines w1: 267.767,111.888 267.767,132.994

## Text inside footprints (layer, text, board x,y; h text height)
Buz1: Top Overlay "+" at 259.761,59.716 h2.29 r180
D2: Top Overlay "K" at 254.152,65.786 h0.76; Mechanical 15 "K" at 254.152,65.786 h0.76
D6: Top Overlay "K" at 240.792,143.789 h0.76 r270; Mechanical 15 "K" at 240.792,143.789 h0.76 r270
D7: Top Overlay "K" at 185.674,143.789 h0.76 r270; Mechanical 15 "K" at 185.674,143.789 h0.76 r270
D11: Top Overlay "K" at 222.631,143.789 h0.76 r270; Mechanical 15 "K" at 222.631,143.789 h0.76 r270
D14: Top Overlay "K" at 203.835,143.789 h0.76 r270; Mechanical 15 "K" at 203.835,143.789 h0.76 r270
D16: Top Overlay "K" at 50.571,40.716 h0.76 r180; Mechanical 15 "K" at 50.571,40.716 h0.76 r180
LED1: Top Overlay "K" at 253.467,48.057 h0.76 r180; Mechanical 15 "K" at 253.467,48.057 h0.76 r180
LED2: Top Overlay "K" at 251.866,47.371 h0.76; Mechanical 15 "K" at 251.866,47.371 h0.76
R14: Top Overlay "Relay" at 241.046,163.982 h1.52 r270
R15: Top Overlay "Relay" at 185.801,163.982 h1.52 r270
R23: Top Overlay "Relay" at 222.885,163.982 h1.52 r270
R27: Top Overlay "Relay" at 203.962,163.982 h1.52 r270
U1: Top Overlay "LPCXpresso 1769" at 212.344,77.241 h1.52